# EAGLE board vgasyncboard (EAGLE 7.2.0)
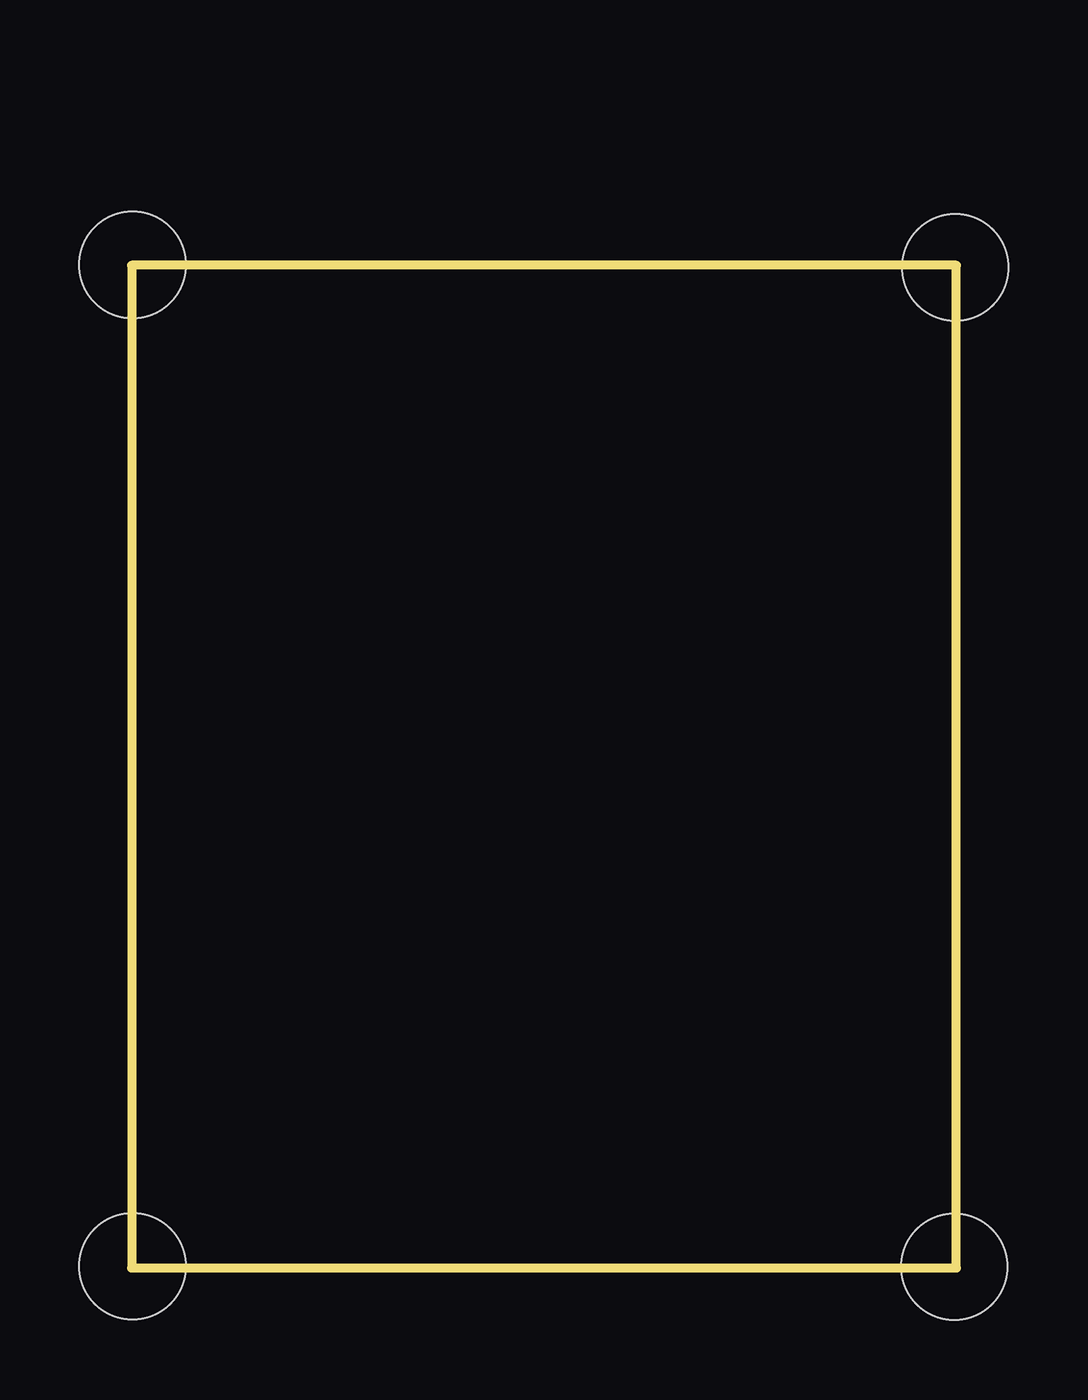
[diagram p0: board, top side]
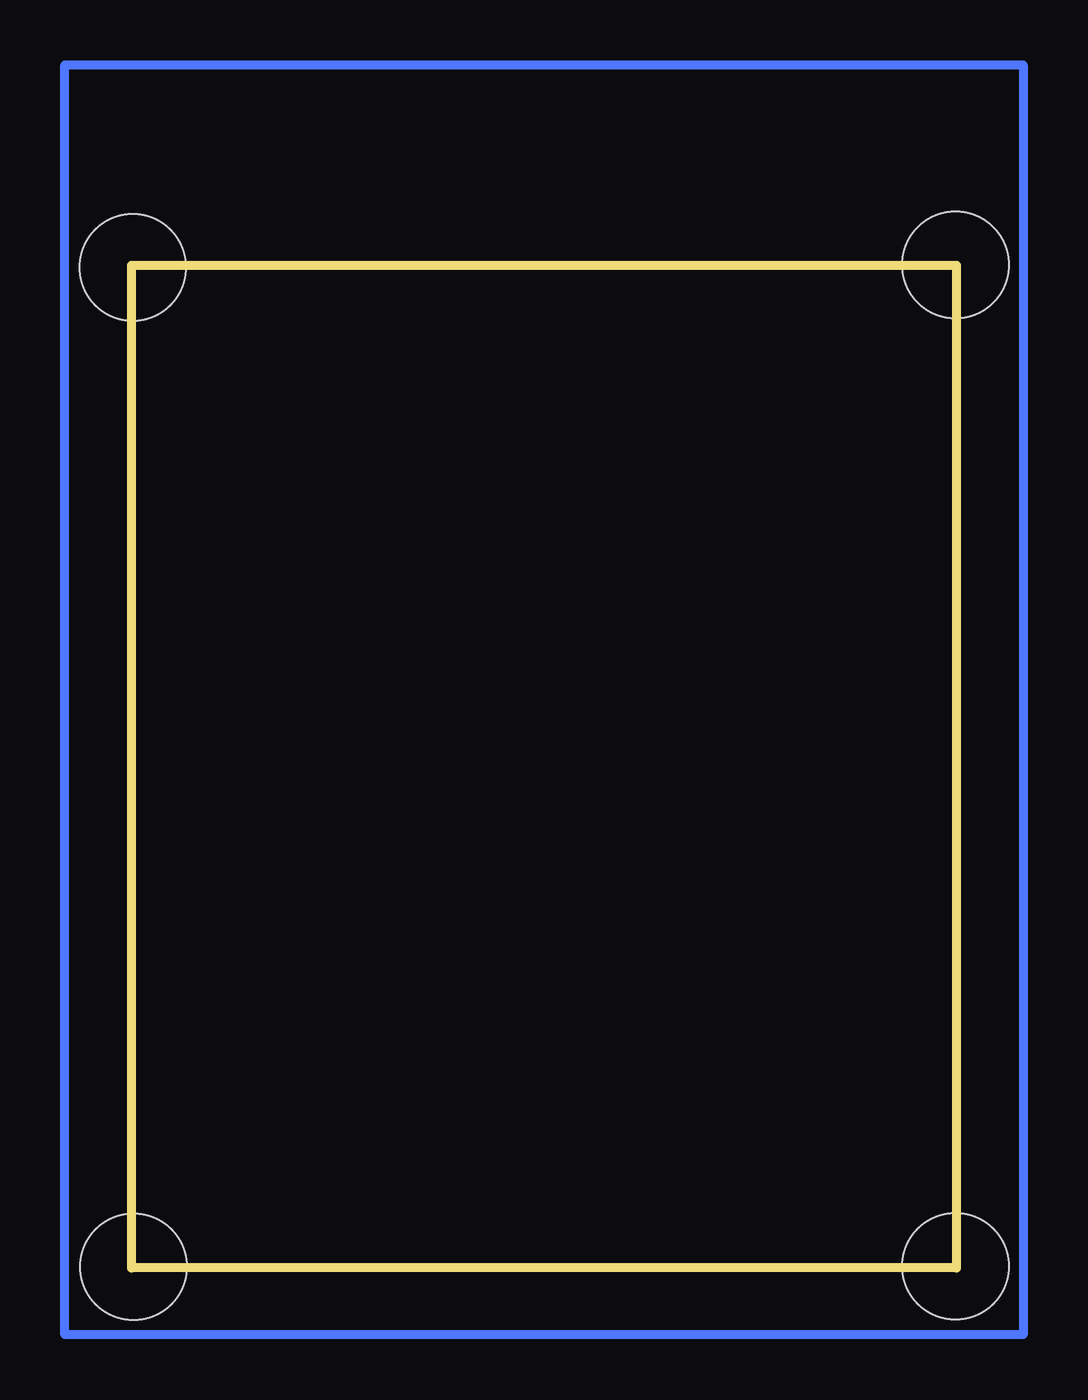
[diagram p1: board, bottom side, seen from below]

Size 37 x 45 mm. Coordinates in mm from the lower left corner, seen from the top.
Outline: 0,0 37,0 37,45 0,45 0,0
Copper layers (1*16): Top 0.035mm / dielectric 1.5mm / Bottom 0.035mm
Design rules "default": minimum track width 10mil, minimum drill 24mil, track to track 8mil, track to pad 8mil, pad to pad 8mil, via to via 8mil, smd to smd 8mil, copper to edge 40mil, drill to drill 8mil, minimum pad ring 10mil, minimum via ring 8mil, stop-mask expansion 4mil, vias tented up to drill 0mil, thermal gap 10mil

## Footprints (pad centres in the part's own frame; a part is rotated, then mirrored left to right if it is on the bottom)
DRILL_0.1875 = hole 4.762: 0,0

## Placement (x,y rotation side)
E$1  [DRILL_0.1875]  0.03,45.01 0 top
E$2  [DRILL_0.1875]  36.95,44.9 0 top
E$3  [DRILL_0.1875]  36.91,0.05 0 top
E$4  [DRILL_0.1875]  0.03,0.07 0 top

## Library data of the parts
E$1-E$4 = special-drill

## Tracks (layer width: path | path; a pad name or v marks a point on that pad's centre or on a via)
S$1
  Bottom 0.406: -3,-3 40,-3 40,54 -3,54 -3,-3